# Altium PCB Snippet of RS485 expander.PcbDoc
Units mil, origin at the board's own origin, x right, y up, seen from the top; angles counter-clockwise.
Board outline not stored, 2 copper layers (Top Layer, Bottom Layer); 9 components, 0 nets, 25 pads, 6 vias.
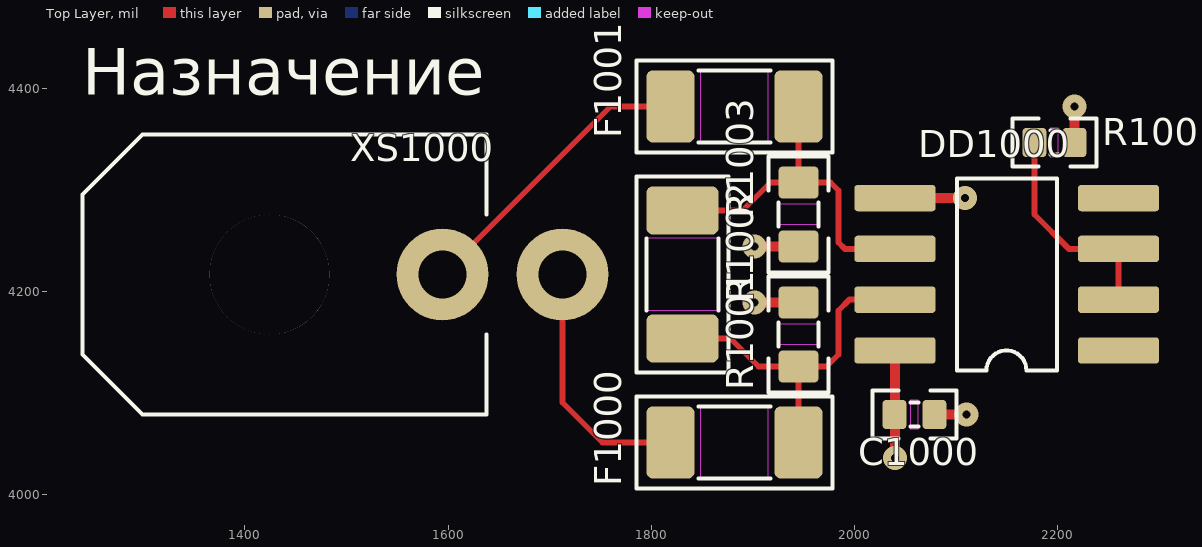
[diagram p0: Top Layer view]
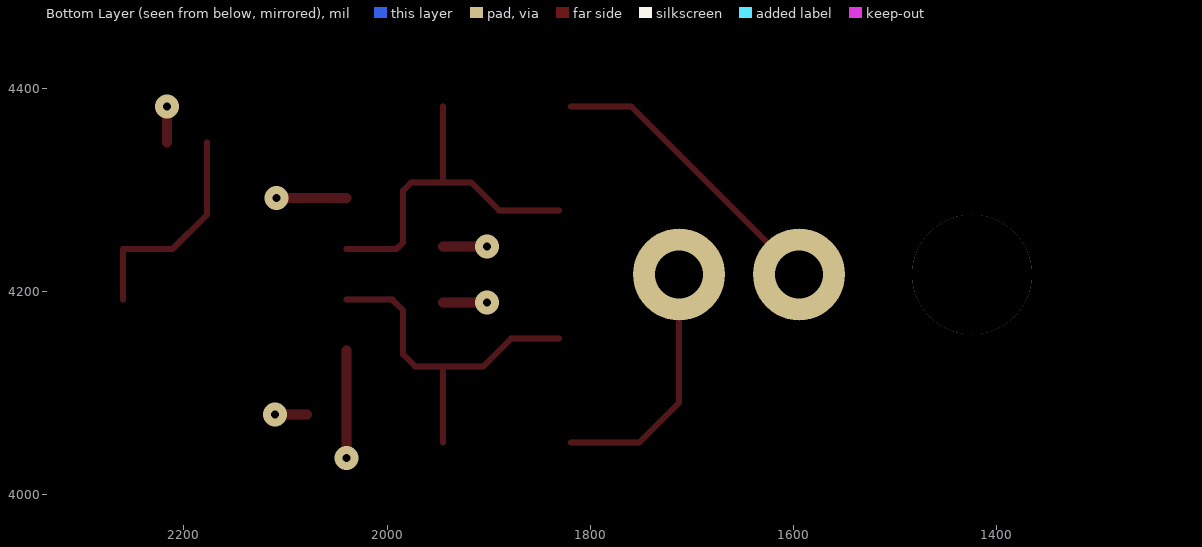
[diagram p1: Bottom Layer view, seen from below]

## Layer stack, top to bottom
Top Solder: solder mask 0.4, Solder Resist, Dk 3.5
Top Layer: signal copper 1.4
Dielectric 1: dielectric 12.6, FR-4, Dk 4.8
Bottom Layer: signal copper 1.4
Bottom Solder: solder mask 0.4, Solder Resist, Dk 3.5

## Components (designator, comment, footprint, x,y, rotation, side; value= is the part's Value field where it differs from the comment)
C1000 "0,1" CAP0402 2059.05,4078.74 r0 top
DD1000 "MAX13443" SO8-3.9 2259.84,4141.73 r180 top
F1000 "0,12A" MF-NSMF 1944.88,4051.18 r180 top
F1001 "0,12A" MF-NSMF 1944.88,4381.89 r180 top
R1000 "10K" RES0402 2196.85,4346.46 r0 top
R1001 "560" RES0603 1944.88,4157.48 r90 top
R1002 "120" RES1206 1830.71,4216.54 r270 top
R1003 "560" RES0603 1944.88,4275.59 r270 top
XS1000 "Назначение" uF-2X1R 1712.6,4216.54 r180 top

## Footprints (in the part's own frame and the unit in brackets; to place one, negate y for a bottom-side part, rotate by r counter-clockwise, add the part's x,y. Pads: shape width x height; smd on the part's side, far side on the other; paste and mask are expansions set on the pad)
CAP0402 [mm]
  rrect25% 0.59x0.72 smd: 1(-0.5,0) 2(0.5,0)
  Top Layer keep-out region: -0.1,0.36 -0.1,-0.36 0.1,-0.36 0.1,0.36
  silkscreen extent -1.05,-0.6 1.05,0.6, body extent -0.5,-0.25 0.5,0.25, height 0.49
MF-NSMF [mm]
  rrect25% 1.2x1.8 smd: 1(0,0) 2(3.2,0)
  Top Layer keep-out region: 0.75,-0.9 2.45,-0.9 2.45,0.9 0.75,0.9
  silkscreen extent -0.85,-1.15 4.05,1.15, body extent 0,-0.82 3.2,0.78, height 0.7
RES0402 [mm]
  rrect25% 0.59x0.72 smd: 1(-0.5,0) 2(0.5,0)
  Top Layer keep-out region: -0.1,0.36 -0.1,-0.36 0.1,-0.36 0.1,0.36
  silkscreen extent -1.05,-0.6 1.05,0.6, body extent -0.5,-0.25 0.5,0.25, height 0.33
RES0603 [mm]
  rrect25% 0.8x1 smd: 1(-0.8,0) 2(0.8,0)
  Top Layer keep-out region: -0.25,0.5 -0.25,-0.5 0.25,-0.5 0.25,0.5
  silkscreen extent -1.45,-0.75 1.45,0.75, body extent -0.77,-0.42 0.78,0.43, height 0.51
RES1206 [mm]
  rrect25% 1.2x1.8 smd: 1(-1.6,0) 2(1.6,0)
  Top Layer keep-out region: -0.9,-0.9 0.9,-0.9 0.9,0.9 -0.9,0.9
  silkscreen extent -2.45,-1.15 2.45,1.15, body extent -1.6,-0.8 1.6,0.8, height 0.61
SO8-3.9 [mil]
  rrect25% 80x26 smd: 1(0,0) 2(0,-50) 3(0,-100) 4(0,-150) 5(220,-150) 6(220,-100) 7(220,-50) 8(220,0)
  silkscreen extent 61,-169 159,20, body extent -8,-173 229,24, height 69
uF-2X1R [mm]
  round 3 hole 3 unplated: 0(7.32,0)
  round 2.3 hole 1.2: 1(0,0) 2(3,0)
  silkscreen extent 1.9,-3.5 12,3.5, body extent -0.32,-3.6 11.92,3.55, height 8.77

## Part data
C1000: library part CAP_0402, "Конденсатор чип"
DD1000: "Интерфейс RS485"
F1000 F1001: library part MF-NSMF, "Предохранитель самовосстанавливающийся"
R1000: library part RES_0402, "Резистор чип"
R1001 R1003: library part RES_0603, "Резистор чип"
R1002: library part RES_1206, "Резистор чип"
XS1000: library part Разъем2_1, "Разъем"

## Via types
v1: diameter 23.62, hole 7.87, Top Layer to Bottom Layer, tented both sides, 6 vias

## Nets (pads, with @x,y where several pads share a name; then routed paths per layer and width w, separated by ;. In a path a pad name is that pad's centre, name@x,y a point inside that pad or via, vN(x,y) a via of type N, cw(c..) or ccw(c..) an arc to the next point about the centre after c; other vN are vias at no path point)
pads on no net: C1000.1 C1000.2 DD1000.1 DD1000.2 DD1000.3 DD1000.4 DD1000.5 DD1000.6 DD1000.7 DD1000.8 F1000.1 F1000.2 F1001.1 F1001.2 R1000.1 R1000.2 R1001.1 R1001.2 R1002.1 R1002.2 R1003.1 R1003.2 XS1000.0 XS1000.1 XS1000.2
copper on no net: | length 1787.6
  Top Layer w5.91: 1594.49,4216.54 1759.84,4381.89 1818.9,4381.89 ; 1712.6,4216.54 1712.6,4090.55 1751.97,4051.18 1818.9,4051.18 ; 1830.71,4153.54 1877.95,4153.54 1905.51,4125.98 1944.88,4125.98 ; 1830.71,4279.53 1889.76,4279.53 1917.32,4307.09 1944.88,4307.09 ; 1944.88,4051.18 1944.88,4125.98 ; 1944.88,4381.89 1944.88,4307.09 ; 2039.84,4191.73 1994.88,4191.73 1984.25,4181.1 1984.25,4137.8 1972.44,4125.98 1944.88,4125.98 ; 2039.84,4241.73 1990.55,4241.73 1984.25,4248.03 1984.25,4299.21 1976.38,4307.09 1944.88,4307.09 ; 2177.17,4346.46 2177.17,4275.59 2211.02,4241.73 2259.84,4241.73 2259.84,4191.73
  Top Layer w9.84: v1(1901.57,4188.98) 1944.88,4188.98 ; v1(1901.57,4244.09) 1944.88,4244.09 ; v1(2039.84,4035.91) 2039.84,4141.73 ; 2039.84,4291.73 v1(2108.66,4291.73) ; 2078.74,4078.74 v1(2110.24,4078.74) ; 2216.54,4346.46 v1(2216.54,4381.89)